# Altium PCB SENSEI_Template_Shield.PcbDoc
Units mm, origin at the board's own origin, x right, y up, seen from the top; angles counter-clockwise.
Board outline 25 x 15 mm, 8 copper layers (Top Layer, Mid-Layer 1, Mid-Layer 2, Mid-Layer 3, Mid-Layer 4, Mid-Layer 5, Mid-Layer 6, Bottom Layer), stack 1.612 mm thick; 4 components, 76 nets, 188 pads, 0 vias.
Unrouted connection lines stored in the file: 80.
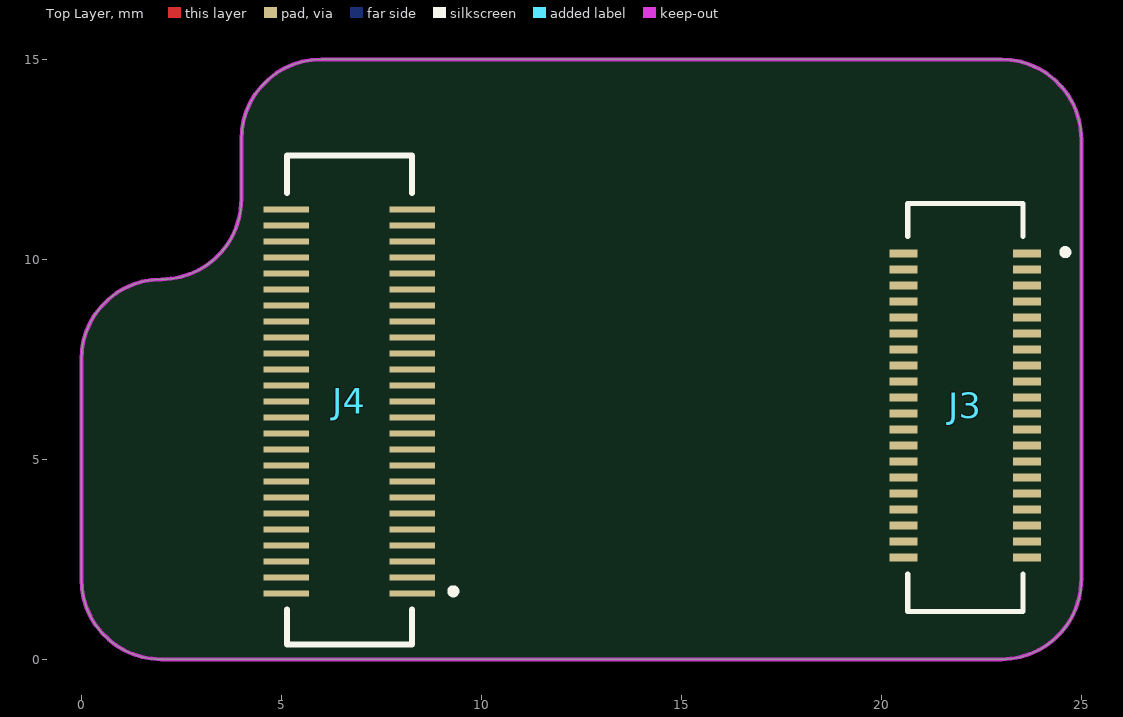
[diagram p0: Top Layer view]
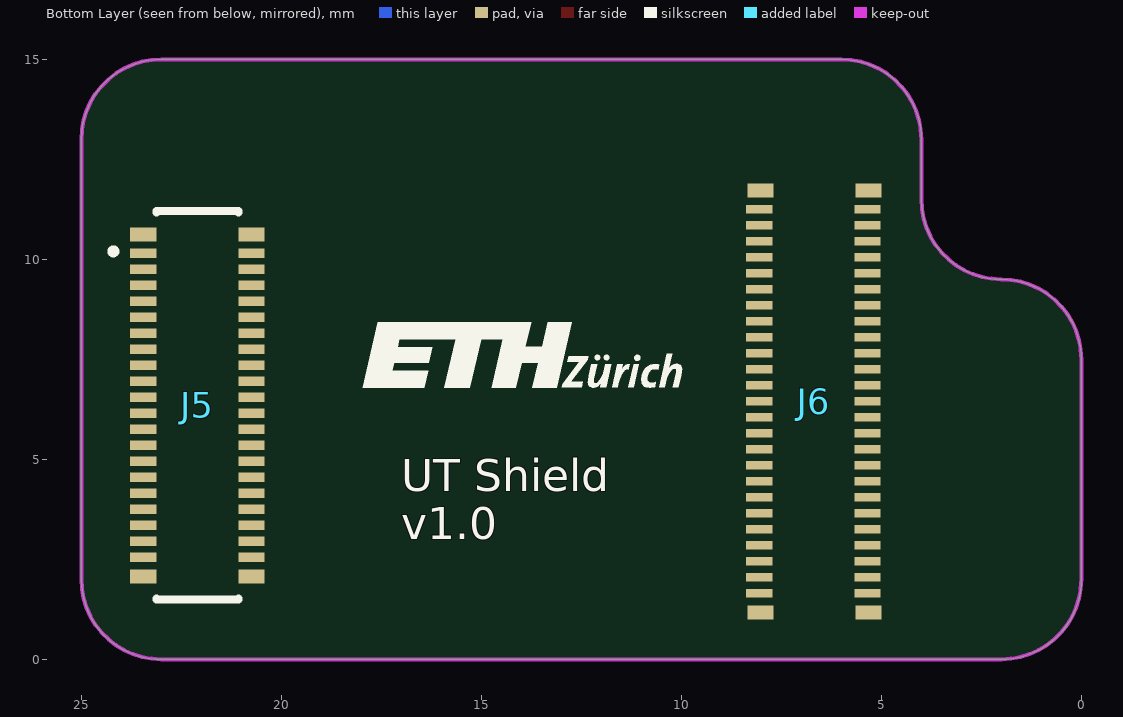
[diagram p1: Bottom Layer view, seen from below]
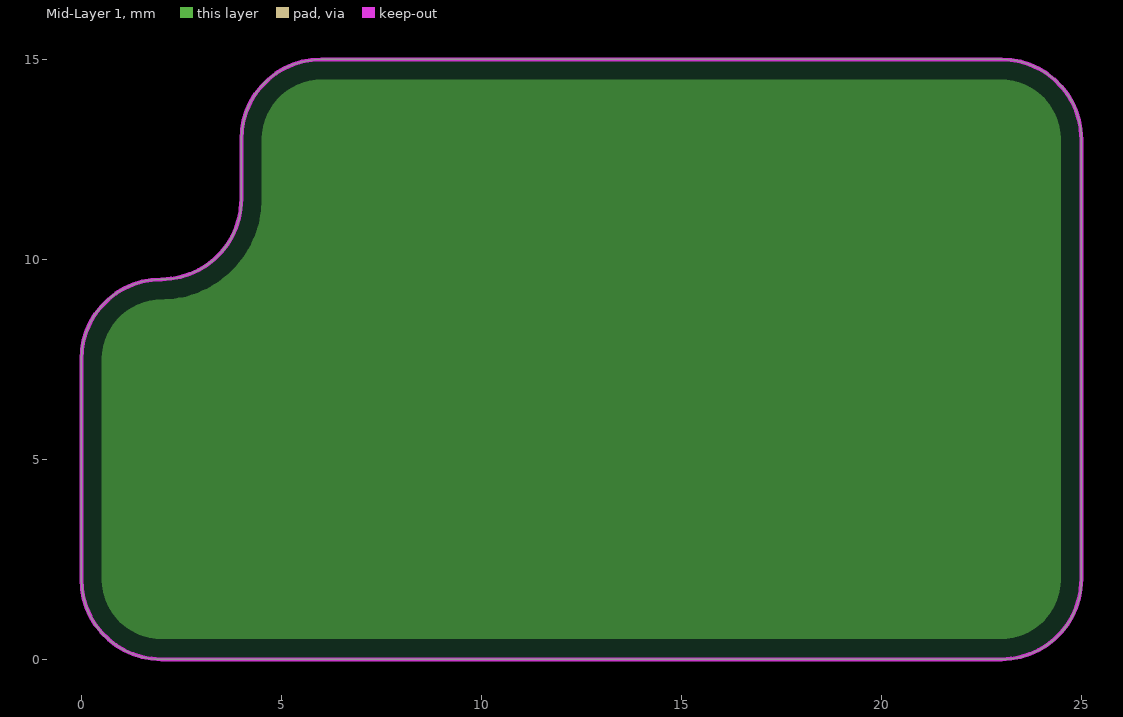
[diagram p2: Mid-Layer 1, clearances drawn from the general rule]
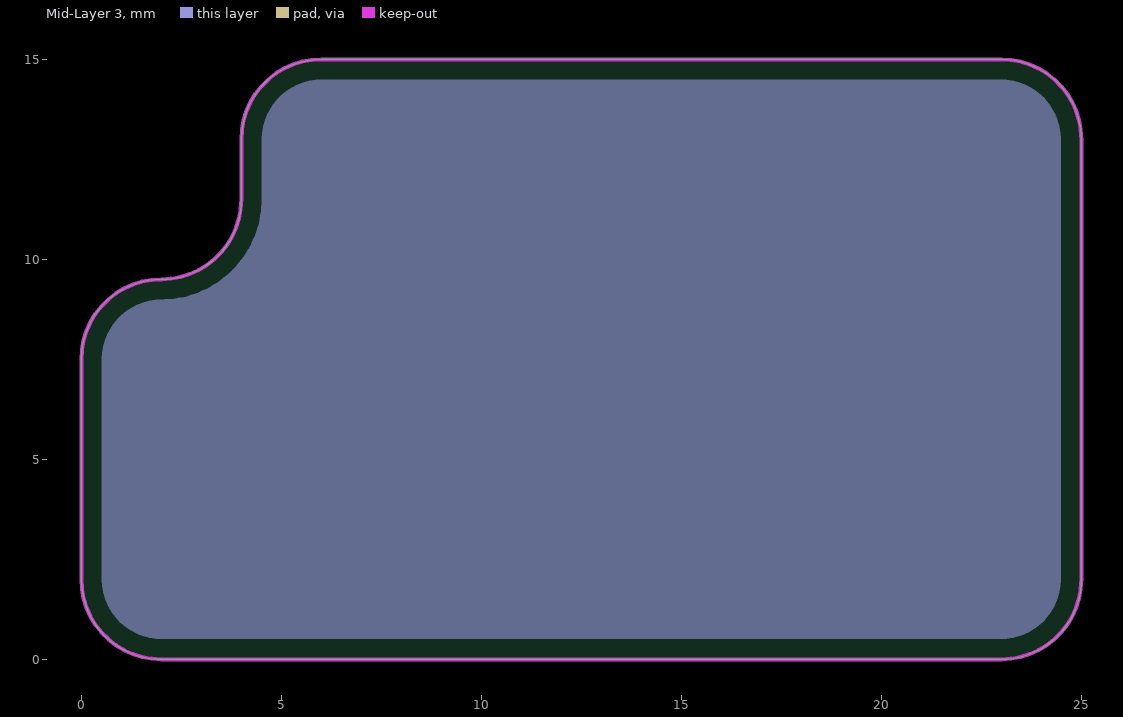
[diagram p3: Mid-Layer 3, clearances drawn from the general rule]
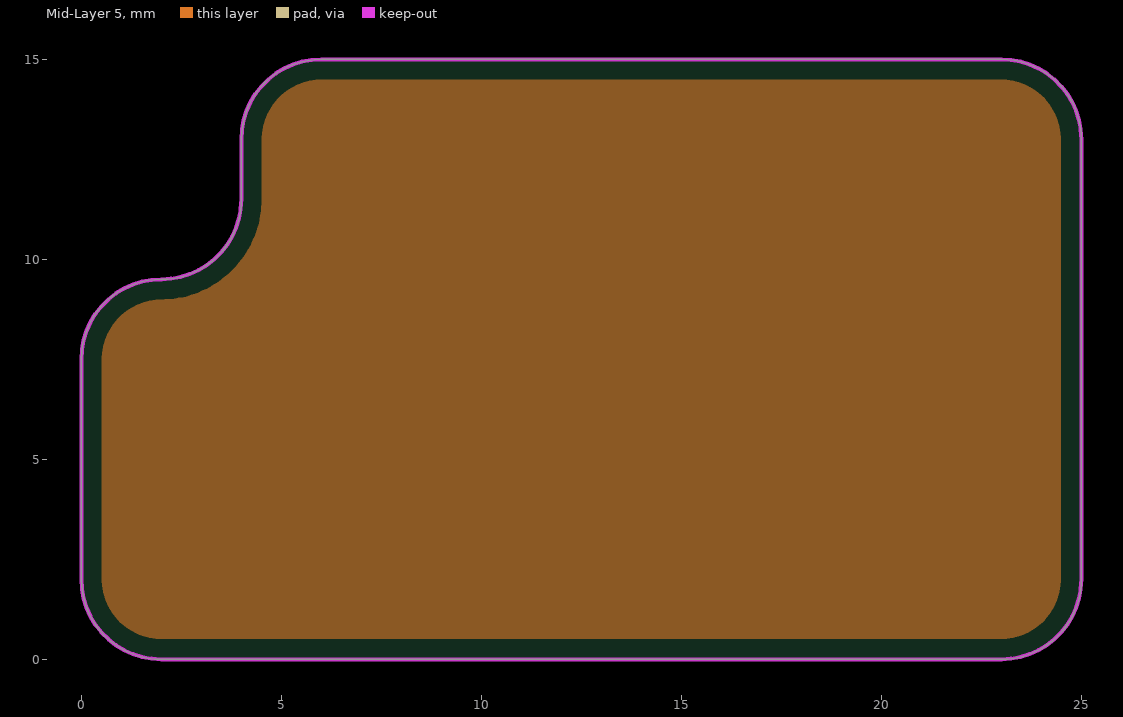
[diagram p4: Mid-Layer 5, clearances drawn from the general rule]
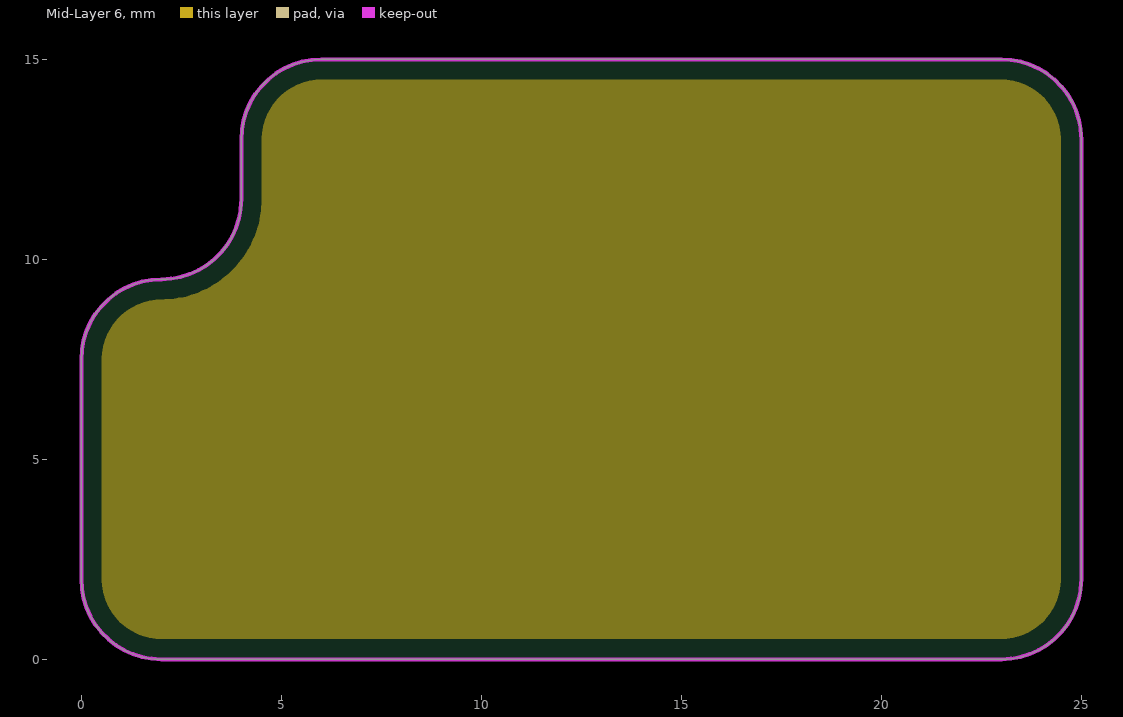
[diagram p5: Mid-Layer 6, clearances drawn from the general rule]

## Layer stack, top to bottom
Top Solder: solder mask 0.0102, Solder Resist, Dk 3.5
Top Layer: signal copper 0.0356
Dielectric1: prepreg 0.107, PP-021, Dk 4.29
Mid-Layer 1: plane copper 0.0356, net GND
Dielectric2: core 0.3, Core-023, Dk 4.29
Mid-Layer 2: signal copper 0.0356
Dielectric 1: prepreg 0.107, PP-021, Dk 4.29
Mid-Layer 3: plane copper 0.0356, net GND
Dielectric3: core 0.3, Core-023, Dk 4.29
Mid-Layer 4: signal copper 0.0356
Dielectric4: prepreg 0.107, PP-021, Dk 4.29
Mid-Layer 5: plane copper 0.0356, net 1V8
Dielectric 3: core 0.3, Core-023, Dk 4.29
Mid-Layer 6: plane copper 0.0356, net GND
Dielectric5: prepreg 0.107, PP-021, Dk 4.29
Bottom Layer: signal copper 0.0356
Bottom Solder: solder mask 0.0102, Solder Resist, Dk 3.5

## Board outline
0,2 ccw(c2,2) 2,0 23,0 ccw(c23,2) 25,2 25,13 ccw(c23,13) 23,15 6,15 ccw(c6,13) 4,13 4,11.5 cw(c2,11.5) 2,9.5 ccw(c2,7.5) 0,7.5

## Design rules (kind name [scope] priority, off if disabled: settings)
BoardOutlineClearance [All] p1: gap=0.25 ignorepadtopadclearanceinfootprint=FALSE except(0: Arc-SplitContinuation Track-SplitContinuation SMDPad-SplitContinuation THPad-SplitContinuation Via-SplitContinuation Fill-SplitContinuation Poly-SplitContinuation Region-SplitContinuation Text-SplitContinuation)
Clearance Clearance_GND [InNetClass('CSI2_CLK') OR InNetClass('CSI2_DATA') Or InNetClass('50Ohm') vs InNet('GND')] p1: gap=0.2 ignorepadtopadclearanceinfootprint=TRUE except(0.15: Arc-SMDPad Track-SMDPad SMDPad-SMDPad; 0.4: Arc-Fill Arc-Poly Arc-Region Track-Fill Track-Poly Track-Region SMDPad-Fill SMDPad-Poly SMDPad-Region THPad-Fill THPad-Poly THPad-Region Via-Fill Via-Poly Via-Region Fill-Fill Fill-Poly Fill-Region Poly-Poly Poly-Region Region-Region)
Clearance Clearance_D100_CLK [InNetClass('CSI2_CLK') vs Not( InNetClass('CSI2_CLK') OR InNet('GND'))] p2: gap=0.4 ignorepadtopadclearanceinfootprint=TRUE
Clearance Clearance_D100_DATA [InNetClass('CSI2_DATA') vs Not( InNetClass('CSI2_DATA') OR InNet('GND'))] p3: gap=0.4 ignorepadtopadclearanceinfootprint=TRUE
Clearance Clearance_S50 [InNetClass('50Ohm') vs Not( InNetClass('50Ohm') OR InNet('GND') or Keepout )] p4: gap=0.4 ignorepadtopadclearanceinfootprint=TRUE
Clearance Clearance-xPP-xTP-xTT [All] p5: gap=0.1 ignorepadtopadclearanceinfootprint=TRUE except(0.2: Arc-Fill Arc-Poly Arc-Region Track-Fill Track-Poly Track-Region SMDPad-Fill SMDPad-Poly SMDPad-Region THPad-Fill THPad-Poly THPad-Region Via-Fill Via-Poly Via-Region Fill-Fill Fill-Poly Fill-Region Poly-Poly Poly-Region Region-Region)
ComponentClearance ComponentClearance_Mechanical [OnMechanical] p1: gap=0 collisioncheckmode=3 verticalgap=0 showdistances=FALSE
ComponentClearance [All] p2: gap=0.25 collisioncheckmode=3 verticalgap=0.25 showdistances=FALSE
DiffPairsRouting "100 Ohm" [InDifferentialPairClass('100Ohm')] p1: maxlimit=0.25 minlimit=0.127 mostfreqgap=0.127 toplayer_minwidth=0.117 toplayer_maxwidth=0.4 toplayer_prefwidth=0.117 midlayer1_minwidth=0.045 midlayer1_maxwidth=0.4 midlayer1_prefwidth=0.052 midlayer4_minwidth=0.052 midlayer4_maxwidth=0.4 midlayer4_prefwidth=0.052 bottomlayer_minwidth=0.117 bottomlayer_maxwidth=0.4 bottomlayer_prefwidth=0.117 impedanceprofiledriven=TRUE impedanceprofileid={66C9644C-2042-4FCB-B803-7A79EBC78C8C} impedanceprofilevalue=100.000000 maxuncoupledlength=12.5
DiffPairsRouting [All] p2: maxlimit=0.25 minlimit=0.15 mostfreqgap=0.25 toplayer_minwidth=0.15 toplayer_maxwidth=0.4 toplayer_prefwidth=0.2 midlayer1_minwidth=0.15 midlayer1_maxwidth=0.4 midlayer1_prefwidth=0.2 midlayer4_minwidth=0.15 midlayer4_maxwidth=0.4 midlayer4_prefwidth=0.2 bottomlayer_minwidth=0.15 bottomlayer_maxwidth=0.4 bottomlayer_prefwidth=0.2 maxuncoupledlength=12.5
Height [All] p1: minheight=0 maxheight=25 prefheight=12.5
HoleSize HoleSize-VIA [IsVia] p1: absolutevalues=TRUE maxlimit=6.2 minlimit=0.2 maxpercent=80.000 minpercent=20.000
HoleSize HoleSize-PTH [All] p2: absolutevalues=TRUE maxlimit=6.2 minlimit=0.2 maxpercent=80.000 minpercent=20.000
HoleToHoleClearance [All] p1: gap=0.3 allowstackedmicrovias=TRUE
MatchedLengths MatchedLengths_D100_InPair [InDifferentialPairClass('100Ohm')] p1: tolerance=0.1 checknetsindiffpair=TRUE checkdiffpairvsdiffpair=FALSE checkxsignals=FALSE checkothers=FALSE
MatchedLengths MatchedLengths_D100 [InDifferentialPairClass('100Ohm')] p2: tolerance=0.2 checknetsindiffpair=FALSE checkdiffpairvsdiffpair=TRUE checkxsignals=TRUE checkothers=TRUE
MaximumViaCount MaximumViaCount_D100 [InDifferentialPairClass('100Ohm')] p1: limit=2
MinimumAnnularRing "Minimum IAR  >0.45mm" [((ObjectKind = 'Pad') OR (ObjectKind = 'Via')) And (Layer = 'MultiLayer') And (HoleDiameter > AsMM(0.45))] p1: minimumring=0.2 // minimum inner annular ring for pads > 0.45mm finished hole size
MinimumAnnularRing "Minimum IAR <=0.45mm" [((ObjectKind = 'Pad') OR (ObjectKind = 'Via')) And (Layer = 'MultiLayer') And (HoleDiameter <= AsMM(0.45))] p2: minimumring=0.1 // minimum inner annular ring for pads <= 0.45mm finished hole size
MinimumSolderMaskSliver [All] p1: minsoldermaskwidth=0.08
PlaneClearance PlaneClearance-IPI [All] p1: clearance=0.25
PlaneConnect [All] p1: planeconnectstyle=Relief reliefexpansion=0.175 reliefentries=4 reliefconductorwidth=0.2 reliefairgap=0.2
PolygonConnect PolygonConnect-xTW [All] p1: connectstyle=Relief reliefconductorwidth=0.2 reliefentries=4 polygonreliefangle="90 Angle" airgapwidth=0.2
ReturnPath ReturnPath_S50 [InNetClass('50Ohm')] p1: impedanceprofileid={A2B40DEE-A9E4-4B6C-8169-857D678A89D5} _gaplimit=2.3
ReturnPath ReturnPath_D100 [InDifferentialPairClass('100Ohm')] p2: impedanceprofileid={66C9644C-2042-4FCB-B803-7A79EBC78C8C} _gaplimit=2.3
RoutingCorners [All] p1: cornerstyle=45-Degree minsetback=2.5 maxsetback=2.5
RoutingVias RoutingVias_Power [InNetClass('Power')] p1: holewidth=0.2 width=0.4 viastyle="Through Hole" minholewidth=0.1 minwidth=0.3 maxholewidth=0.45 maxwidth=0.8 // finishet hole size <= 0.45mm
RoutingVias [All] p2: holewidth=0.2 width=0.4 viastyle="Through Hole" minholewidth=0.2 minwidth=0.4 maxholewidth=0.45 maxwidth=0.8 // finishet hole size <= 0.45mm
SilkToSilkClearance [All] p1: silktosilkclearance=0.2
SilkToSolderMaskClearance SilkscreenOverComponentPads [IsPad] p1: minsilkscreentomaskgap=0.2 clearancetoexposedcopper=TRUE
SolderMaskExpansion SolderMaskExpansion_VIA [(ObjectKind = 'Via')] p1: expansion=0 istentingtop=FALSE
SolderMaskExpansion [All] p2: expansion=0 istentingtop=FALSE
UnRoutedNet [All] p1: checkbadconnections=TRUE
Width Width_S50 [InNetClass('50Ohm')] p1: maxlimit=0.305 minlimit=0.104 preferedwidth=0.178 toplayer_minwidth=0.178 midlayer1_maxwidth=0.254 midlayer1_prefwidth=0.104 midlayer4_maxwidth=0.254 midlayer4_prefwidth=0.104 bottomlayer_minwidth=0.178 impedanceprofiledriven=TRUE impedanceprofileid={A2B40DEE-A9E4-4B6C-8169-857D678A89D5} impedanceprofilevalue=50.000000 minimp=50.000000 maximp=50.000000 favimp=50.000000
Width Width-xTW [All] p2: maxlimit=1.5 minlimit=0.15 preferedwidth=0.15 minimp=50.000000 maximp=50.000000 favimp=50.000000
Width [InNetClass('Power')] p3: maxlimit=2 minlimit=0.15 preferedwidth=0.2 minimp=50.000000 maximp=50.000000 favimp=50.000000
18 further rules are at their usual default settings.

## Classes and differential pairs
net class CSI2_DATA: CSI_D0_N CSI_D0_P
net class CSI2_CLK: CSI_CLK_N CSI_CLK_P

## Components (designator, comment, footprint, x,y, rotation, side; value= is the part's Value field where it differs from the comment)
J3 "DF40HC(3.0)-40DS-0.4V(51)" DF40HC3040DS04V51 22.1,6.35 r270 top locked
J4 "DF40HC(3.0)-50DS-0.4V(51)" DF40HC3050DS04V51 6.7,6.45 r90 top locked
J5 "DF40C-40DP-0.4V(51)" FP-DF40C-40DP-0_4V_51-MFG 22.1,6.35 r270 bottom locked
J6 "DF40C-50DP-0.4V(51)" CONN_COMBI_50P 6.7,6.45 r0 bottom locked

## Footprints (in the part's own frame and the unit in brackets; to place one, negate y for a bottom-side part, rotate by r counter-clockwise, add the part's x,y. Pads: shape width x height; smd on the part's side, far side on the other; paste and mask are expansions set on the pad)
CONN_COMBI_50P [mm] "50Pin 0.4mm pitch connector footprint that accepts (male) connectors intended for different stacking heights:  Hirose - DF40C-50DP-0.4V(51) for 1.5mm - 3mm stacking height , JAE - WP7B-P050VA1-R8000 - for 0.7mm stacking height"
  rect 0.66x0.22 smd: 1(1.355,4.8) 2(1.355,4.4) 3(1.355,4) 4(1.355,3.6) 5(1.355,3.2) 6(1.355,2.8) 7(1.355,2.4) 8(1.355,2) 9(1.355,1.6) 10(1.355,1.2) 11(1.355,0.8) 12(1.355,0.4) 13(1.355,0) 14(1.355,-0.4) 15(1.355,-0.8) 16(1.355,-1.2) 17(1.355,-1.6) 18(1.355,-2) 19(1.355,-2.4) 20(1.355,-2.8) 21(1.355,-3.2) 22(1.355,-3.6) 23(1.355,-4) 24(1.355,-4.4) 25(1.355,-4.8) 26(-1.355,-4.8) 27(-1.355,-4.4) 28(-1.355,-4) 29(-1.355,-3.6) 30(-1.355,-3.2) 31(-1.355,-2.8) 32(-1.355,-2.4) 33(-1.355,-2) 34(-1.355,-1.6) 35(-1.355,-1.2) 36(-1.355,-0.8) 37(-1.355,-0.4) 38(-1.355,0) 39(-1.355,0.4) 40(-1.355,0.8) 41(-1.355,1.2) 42(-1.355,1.6) 43(-1.355,2) 44(-1.355,2.4) 45(-1.355,2.8) 46(-1.355,3.2) 47(-1.355,3.6) 48(-1.355,4) 49(-1.355,4.4) 50(-1.355,4.8)
  rect 0.65x0.35 smd: 56(-1.375,-5.275) 56(-1.375,5.275) 56(1.325,-5.275) 56(1.325,5.275)
  body extent -1.49,-5.74 1.48,5.78, height 1.14
DF40HC3040DS04V51 [mm]
  rect 0.2x0.7 smd: 1(-3.8,1.54) 2(-3.8,-1.54) 3(-3.4,1.54) 4(-3.4,-1.54) 5(-3,1.54) 6(-3,-1.54) 7(-2.6,1.54) 8(-2.6,-1.54) 9(-2.2,1.54) 10(-2.2,-1.54) 11(-1.8,1.54) 12(-1.8,-1.54) 13(-1.4,1.54) 14(-1.4,-1.54) 15(-1,1.54) 16(-1,-1.54) 17(-0.6,1.54) 18(-0.6,-1.54) 19(-0.2,1.54) 20(-0.2,-1.54) 21(0.2,1.54) 22(0.2,-1.54) 23(0.6,1.54) 24(0.6,-1.54) 25(1,1.54) 26(1,-1.54) 27(1.4,1.54) 28(1.4,-1.54) 29(1.8,1.54) 30(1.8,-1.54) 31(2.2,1.54) 32(2.2,-1.54) 33(2.6,1.54) 34(2.6,-1.54) 35(3,1.54) 36(3,-1.54) 37(3.4,1.54) 38(3.4,-1.54) 39(3.8,1.54) 40(3.8,-1.54)
  silkscreen extent -5.05,-1.44 5.15,2.55, body extent -5.3,-1.69 5.3,1.69, height 2.89
DF40HC3050DS04V51 [mil]
  rect 6x44.56 smd paste+0 mask+0: 1(-188.98,-62) 2(-173.23,-62) 3(-157.48,-62) 4(-141.73,-62) 5(-125.98,-62) 6(-110.24,-62) 7(-94.49,-62) 8(-78.74,-62) 9(-62.99,-62) 10(-47.24,-62) 11(-31.5,-62) 12(-15.75,-62) 13(0,-62) 14(15.75,-62) 15(31.5,-62) 16(47.24,-62) 17(62.99,-62) 18(78.74,-62) 19(94.49,-62) 20(110.24,-62) 21(125.98,-62) 22(141.73,-62) 23(157.48,-62) 24(173.23,-62) 25(188.98,-62) 26(188.98,62) 27(173.23,62) 28(157.48,62) 29(141.73,62) 30(125.98,62) 31(110.24,62) 32(94.49,62) 33(78.74,62) 34(62.99,62) 35(47.24,62) 36(31.5,62) 37(15.75,62) 38(0,62) 39(-15.75,62) 40(-31.5,62) 41(-47.24,62) 42(-62.99,62) 43(-78.74,62) 44(-94.49,62) 45(-110.24,62) 46(-125.98,62) 47(-141.73,62) 48(-157.48,62) 49(-173.23,62) 50(-188.98,62)
  silkscreen extent -239,-104 242,62, body extent -248,-67 248,67, height 114
FP-DF40C-40DP-0_4V_51-MFG [mm]
  rect 0.23x0.66 smd paste-1000 mask+0: 1(-3.8,-1.355) 2(-3.8,1.355) 3(-3.4,-1.355) 4(-3.4,1.355) 5(-3,-1.355) 6(-3,1.355) 7(-2.6,-1.355) 8(-2.6,1.355) 9(-2.2,-1.355) 10(-2.2,1.355) 11(-1.8,-1.355) 12(-1.8,1.355) 13(-1.4,-1.355) 14(-1.4,1.355) 15(-1,-1.355) 16(-1,1.355) 17(-0.6,-1.355) 18(-0.6,1.355) 19(-0.2,-1.355) 20(-0.2,1.355) 21(0.2,-1.355) 22(0.2,1.355) 23(0.6,-1.355) 24(0.6,1.355) 25(1,-1.355) 26(1,1.355) 27(1.4,-1.355) 28(1.4,1.355) 29(1.8,-1.355) 30(1.8,1.355) 31(2.2,-1.355) 32(2.2,1.355) 33(2.6,-1.355) 34(2.6,1.355) 35(3,-1.355) 36(3,1.355) 37(3.4,-1.355) 38(3.4,1.355) 39(3.8,-1.355) 40(3.8,1.355)
  rect 0.35x0.66 smd paste+0 mask+0: 41(-4.275,1.355) 42(4.275,1.355) 43(-4.275,-1.355) 44(4.275,-1.355)
  silkscreen extent -4.86,-2.15 4.86,1.02, body extent -4.76,-1.49 4.76,1.48, height 1.29

## Part data
J3: "40 Position 0.4mm Pitch Dual Row Vertical Surface Mount (SMT) Pin Socket, 3.0mm Stacking Height", Package=None, Availability=Unavailable, MP=DF40HC(3.0)-40DS-0.4V(51), Price=None, System=Connector
J4: "50 Position 0.4mm Pitch Dual Row Vertical Surface Mount (SMT) Pin Socket, 3.0mm Stacking Height", Mfr_Name=Hirose, Copyright="Copyright (C) 2023 Ultra Librarian. All rights reserved.", Manufacturer_Part_Number=DF40HC(3.0)-50DS-0.4V(51), RefDes=RefDes, Type=DEV
J5: "50 Position 0.4mm Pitch Dual Row Vertical Surface Mount (SMT) Receptacle", Current Rating=300mA, Max Operating Temperature=85°C, Min Operating Temperature=-35°C, Package Quantity=1, Voltage Rating=30V, Connector Type=Plug, Contact Material=Bronze, Contact Plating=Gold, Gender=Male, Housing Material=Polymer, Lead Free="Lead Free", Mated Stacking Heights=4mm, Mount="Surface Mount", Number of Contacts=40, Number of Positions=40, Number of Rows=2, Orientation=Straight, Packaging="Tape and Reel", Pitch=0.4mm, REACH SVHC="No SVHC", System=Connector, Termination=SMD/SMT
J6: "50 Position 0.4mm Pitch Dual Row Vertical Surface Mount (SMT) Receptacle,", Mfr_Name=Hirose, Copyright="Copyright (C) 2023 Ultra Librarian. All rights reserved.", Manufacturer_Part_Number=DF40C-50DP-0.4V(51), RefDes=RefDes, System=Connector, Type=DEV

## Nets (pads, with @x,y where several pads share a name; then routed paths per layer and width w, separated by ;. In a path a pad name is that pad's centre, name@x,y a point inside that pad or via, vN(x,y) a via of type N, cw(c..) or ccw(c..) an arc to the next point about the centre after c; other vN are vias at no path point)
1V8: J4.6 J4.7 J6.6 J6.7
ADS_A_DR: J4.22 J6.22
ADS_B_DR: J4.23 J6.23
CSI_CLK_N: J3.17 J5.17
CSI_CLK_P: J3.19 J5.19
CSI_D0_N: J3.23 J5.23
CSI_D0_P: J3.25 J5.25
EXT_CHG/VUSB: J4.47 J4.48 J6.47 J6.48
GND: J3.15 J3.21 J3.27 J4.8 J4.18 J4.33 J4.43 J5.15 J5.21 J5.27 J6.8 J6.18 J6.33 J6.43
I2C_A_SCL: J4.36 J6.36
I2C_A_SDA: J4.35 J6.35
I2C_B_SCL: J4.30 J6.30
I2C_B_SDA: J4.32 J6.32
MIC_CLK: J3.36 J5.36
MIC_DATA: J3.34 J5.34
MIC_THSEL: J3.38 J5.38
MIC_WAKE: J3.40 J5.40
MSP_CS: J4.12 J6.12
MSP_DR1: J4.13 J6.13
MSP_DR2: J4.21 J6.21
MSP_T\R\S\T\: J4.50 J6.50
MSP_TCK: J4.49 J6.49
MSP_TDI: J4.39 J6.39
MSP_TDO: J4.38 J6.38
MSP_TMS: J4.40 J6.40
MSP_VCC: J4.37 J6.37
NetJ3_1: J3.1 J5.1
NetJ3_3: J3.3 J5.3
NetJ3_5: J3.5 J5.5
NetJ3_7: J3.7 J5.7
NetJ3_9: J3.9 J5.9
NetJ3_11: J3.11 J5.11
NetJ3_13: J3.13 J5.13
NetJ3_16: J3.16 J5.16
NetJ3_18: J3.18 J5.18
NetJ3_29: J3.29 J5.29
NetJ3_31: J3.31 J5.31
NetJ3_33: J3.33 J5.33
NetJ3_35: J3.35 J5.35
NetJ3_37: J3.37 J5.37
NetJ3_39: J3.39 J5.39
nRF_P0.04: J3.20 J5.20
nRF_P0.05: J3.22 J5.22
nRF_P0.07/AMUX: J3.26 J5.26
nRF_P0.12_GAP_GPIO64: J3.12 J5.12
nRF_P0.31: J3.2 J5.2
nRF_P1.00_GAP_GPIO60: J3.4 J5.4
nRF_P1.01_GAP_GPIO61: J3.6 J5.6
nRF_P1.09_GAP_GPIO62: J3.8 J5.8
nRF_P1.11_GAP_GPIO63: J3.10 J5.10
nRF_QSPI_CLK: J4.20 J6.20
nRF_QSPI_CS_CONN: J4.14 J6.14
nRF_QSPI_IO0: J4.19 J6.19
nRF_QSPI_IO1: J4.17 J6.17
nRF_QSPI_IO2: J4.16 J6.16
nRF_QSPI_IO3: J4.15 J6.15
R\S\T\: J4.5 J6.5
SPI_A_CLK: J4.31 J6.31
SPI_A_CS: J4.28 J6.28
SPI_A_MISO: J4.34 J6.34
SPI_A_MOSI: J4.29 J6.29
SPI_B_CLK: J4.27 J6.27
SPI_B_CS: J4.24 J6.24
SPI_B_MISO: J4.26 J6.26
SPI_B_MOSI: J4.25 J6.25
SWDCLK: J4.45 J6.45
SWDIO: J4.46 J6.46
SWO: J4.44 J6.44
VA0: J4.41 J6.41
VA1: J4.11 J6.11
VBAT: J4.1 J4.2 J6.1 J6.2
VD0: J4.42 J6.42
VD1: J4.9 J6.9
VD2: J4.10 J6.10
VQPS_FUSE_1V8: J3.14 J5.14
Vsys: J4.3 J4.4 J6.3 J6.4
pads on no net: J3.24 J3.28 J3.30 J3.32 J5.24 J5.28 J5.30 J5.32 J5.41 J5.42 J5.43 J5.44 J6.56

## Polygon pours and split planes (outlines as drawn)
GND on Mid-Layer 1 (split plane): 23.167,14.482 23.332,14.454 23.493,14.408 23.647,14.344 23.794,14.263 23.93,14.166 24.055,14.055 24.166,13.93 24.263,13.794 24.344,13.647 24.408,13.493 24.454,13.332 24.482,13.167 24.491,13.015 24.49,13 24.49,2 24.491,1.985 24.482,1.833 24.454,1.668 24.408,1.507 24.344,1.353 24.263,1.206 24.166,1.07 24.055,0.945 23.93,0.834 23.794,0.737 23.647,0.656 23.493,0.592 23.332,0.546 23.167,0.518 23.015,0.509 23,0.51 2,0.51 1.985,0.509 1.833,0.518 1.668,0.546 1.507,0.592 1.353,0.656 1.206,0.737 1.07,0.834 0.945,0.945 0.834,1.07 0.737,1.206 0.656,1.353 0.592,1.507 0.546,1.668 0.518,1.833 0.509,1.985 0.51,2 0.51,7.5 0.509,7.515 0.518,7.667 0.546,7.832 0.592,7.993 0.656,8.147 0.737,8.294 0.834,8.43 0.945,8.555 1.07,8.666 1.206,8.763 1.353,8.844 1.507,8.908 1.668,8.954 1.833,8.982 1.985,8.991 2,8.99 2.001,8.99 2.219,8.999 2.436,9.028 2.65,9.075 2.859,9.141 3.061,9.225 3.255,9.326 3.44,9.444 3.614,9.577 3.775,9.725 3.923,9.886 4.056,10.06 4.174,10.245 4.275,10.439 4.359,10.641 4.425,10.85 4.472,11.064 4.501,11.281 4.51,11.499 4.51,11.5 4.51,13 4.509,13.015 4.518,13.167 4.546,13.332 4.592,13.493 4.656,13.647 4.737,13.794 4.834,13.93 4.945,14.055 5.07,14.166 5.206,14.263 5.353,14.344 5.507,14.408 5.668,14.454 5.833,14.482 5.985,14.491 6,14.49 23,14.49 23.015,14.491
GND on Mid-Layer 3 (split plane): 23.167,14.482 23.332,14.454 23.493,14.408 23.647,14.344 23.794,14.263 23.93,14.166 24.055,14.055 24.166,13.93 24.263,13.794 24.344,13.647 24.408,13.493 24.454,13.332 24.482,13.167 24.491,13.015 24.49,13 24.49,2 24.491,1.985 24.482,1.833 24.454,1.668 24.408,1.507 24.344,1.353 24.263,1.206 24.166,1.07 24.055,0.945 23.93,0.834 23.794,0.737 23.647,0.656 23.493,0.592 23.332,0.546 23.167,0.518 23.015,0.509 23,0.51 2,0.51 1.985,0.509 1.833,0.518 1.668,0.546 1.507,0.592 1.353,0.656 1.206,0.737 1.07,0.834 0.945,0.945 0.834,1.07 0.737,1.206 0.656,1.353 0.592,1.507 0.546,1.668 0.518,1.833 0.509,1.985 0.51,2 0.51,7.5 0.509,7.515 0.518,7.667 0.546,7.832 0.592,7.993 0.656,8.147 0.737,8.294 0.834,8.43 0.945,8.555 1.07,8.666 1.206,8.763 1.353,8.844 1.507,8.908 1.668,8.954 1.833,8.982 1.985,8.991 2,8.99 2.001,8.99 2.219,8.999 2.436,9.028 2.65,9.075 2.859,9.141 3.061,9.225 3.255,9.326 3.44,9.444 3.614,9.577 3.775,9.725 3.923,9.886 4.056,10.06 4.174,10.245 4.275,10.439 4.359,10.641 4.425,10.85 4.472,11.064 4.501,11.281 4.51,11.499 4.51,11.5 4.51,13 4.509,13.015 4.518,13.167 4.546,13.332 4.592,13.493 4.656,13.647 4.737,13.794 4.834,13.93 4.945,14.055 5.07,14.166 5.206,14.263 5.353,14.344 5.507,14.408 5.668,14.454 5.833,14.482 5.985,14.491 6,14.49 23,14.49 23.015,14.491
1V8 on Mid-Layer 5 (split plane): 23.167,14.482 23.332,14.454 23.493,14.408 23.647,14.344 23.794,14.263 23.93,14.166 24.055,14.055 24.166,13.93 24.263,13.794 24.344,13.647 24.408,13.493 24.454,13.332 24.482,13.167 24.491,13.015 24.49,13 24.49,2 24.491,1.985 24.482,1.833 24.454,1.668 24.408,1.507 24.344,1.353 24.263,1.206 24.166,1.07 24.055,0.945 23.93,0.834 23.794,0.737 23.647,0.656 23.493,0.592 23.332,0.546 23.167,0.518 23.015,0.509 23,0.51 2,0.51 1.985,0.509 1.833,0.518 1.668,0.546 1.507,0.592 1.353,0.656 1.206,0.737 1.07,0.834 0.945,0.945 0.834,1.07 0.737,1.206 0.656,1.353 0.592,1.507 0.546,1.668 0.518,1.833 0.509,1.985 0.51,2 0.51,7.5 0.509,7.515 0.518,7.667 0.546,7.832 0.592,7.993 0.656,8.147 0.737,8.294 0.834,8.43 0.945,8.555 1.07,8.666 1.206,8.763 1.353,8.844 1.507,8.908 1.668,8.954 1.833,8.982 1.985,8.991 2,8.99 2.001,8.99 2.219,8.999 2.436,9.028 2.65,9.075 2.859,9.141 3.061,9.225 3.255,9.326 3.44,9.444 3.614,9.577 3.775,9.725 3.923,9.886 4.056,10.06 4.174,10.245 4.275,10.439 4.359,10.641 4.425,10.85 4.472,11.064 4.501,11.281 4.51,11.499 4.51,11.5 4.51,13 4.509,13.015 4.518,13.167 4.546,13.332 4.592,13.493 4.656,13.647 4.737,13.794 4.834,13.93 4.945,14.055 5.07,14.166 5.206,14.263 5.353,14.344 5.507,14.408 5.668,14.454 5.833,14.482 5.985,14.491 6,14.49 23,14.49 23.015,14.491
GND on Mid-Layer 6 (split plane): 23.167,14.482 23.332,14.454 23.493,14.408 23.647,14.344 23.794,14.263 23.93,14.166 24.055,14.055 24.166,13.93 24.263,13.794 24.344,13.647 24.408,13.493 24.454,13.332 24.482,13.167 24.491,13.015 24.49,13 24.49,2 24.491,1.985 24.482,1.833 24.454,1.668 24.408,1.507 24.344,1.353 24.263,1.206 24.166,1.07 24.055,0.945 23.93,0.834 23.794,0.737 23.647,0.656 23.493,0.592 23.332,0.546 23.167,0.518 23.015,0.509 23,0.51 2,0.51 1.985,0.509 1.833,0.518 1.668,0.546 1.507,0.592 1.353,0.656 1.206,0.737 1.07,0.834 0.945,0.945 0.834,1.07 0.737,1.206 0.656,1.353 0.592,1.507 0.546,1.668 0.518,1.833 0.509,1.985 0.51,2 0.51,7.5 0.509,7.515 0.518,7.667 0.546,7.832 0.592,7.993 0.656,8.147 0.737,8.294 0.834,8.43 0.945,8.555 1.07,8.666 1.206,8.763 1.353,8.844 1.507,8.908 1.668,8.954 1.833,8.982 1.985,8.991 2,8.99 2.001,8.99 2.219,8.999 2.436,9.028 2.65,9.075 2.859,9.141 3.061,9.225 3.255,9.326 3.44,9.444 3.614,9.577 3.775,9.725 3.923,9.886 4.056,10.06 4.174,10.245 4.275,10.439 4.359,10.641 4.425,10.85 4.472,11.064 4.501,11.281 4.51,11.499 4.51,11.5 4.51,13 4.509,13.015 4.518,13.167 4.546,13.332 4.592,13.493 4.656,13.647 4.737,13.794 4.834,13.93 4.945,14.055 5.07,14.166 5.206,14.263 5.353,14.344 5.507,14.408 5.668,14.454 5.833,14.482 5.985,14.491 6,14.49 23,14.49 23.015,14.491

## Keep-outs
Keep-Out Layer:
  the board outline again, w0.1

## Silkscreen, mask and mechanical layers (free items; w line width, h text height)
Bottom Overlay:
  drawing of 10 lines, arcs and shapes, not listed
  text "UT Shield / v1.0" at 17,3 h0.8
Mechanical 1:
  text ".Pcb_File_Name_No_Path" at 0,-2.5 h1.52